# Altium PCB interface.PcbDoc (part 1 of 2)
Units mm, origin at the board's own origin, x right, y up, seen from the top; angles counter-clockwise.
Board outline 52.5 x 75 mm, 4 copper layers (Top Layer 1, Top Layer, Bottom Layer, Bottom Layer 1), stack 1.483 mm thick; 90 components, 72 nets, 327 pads, 41 vias.
Unrouted connection lines stored in the file: 2.
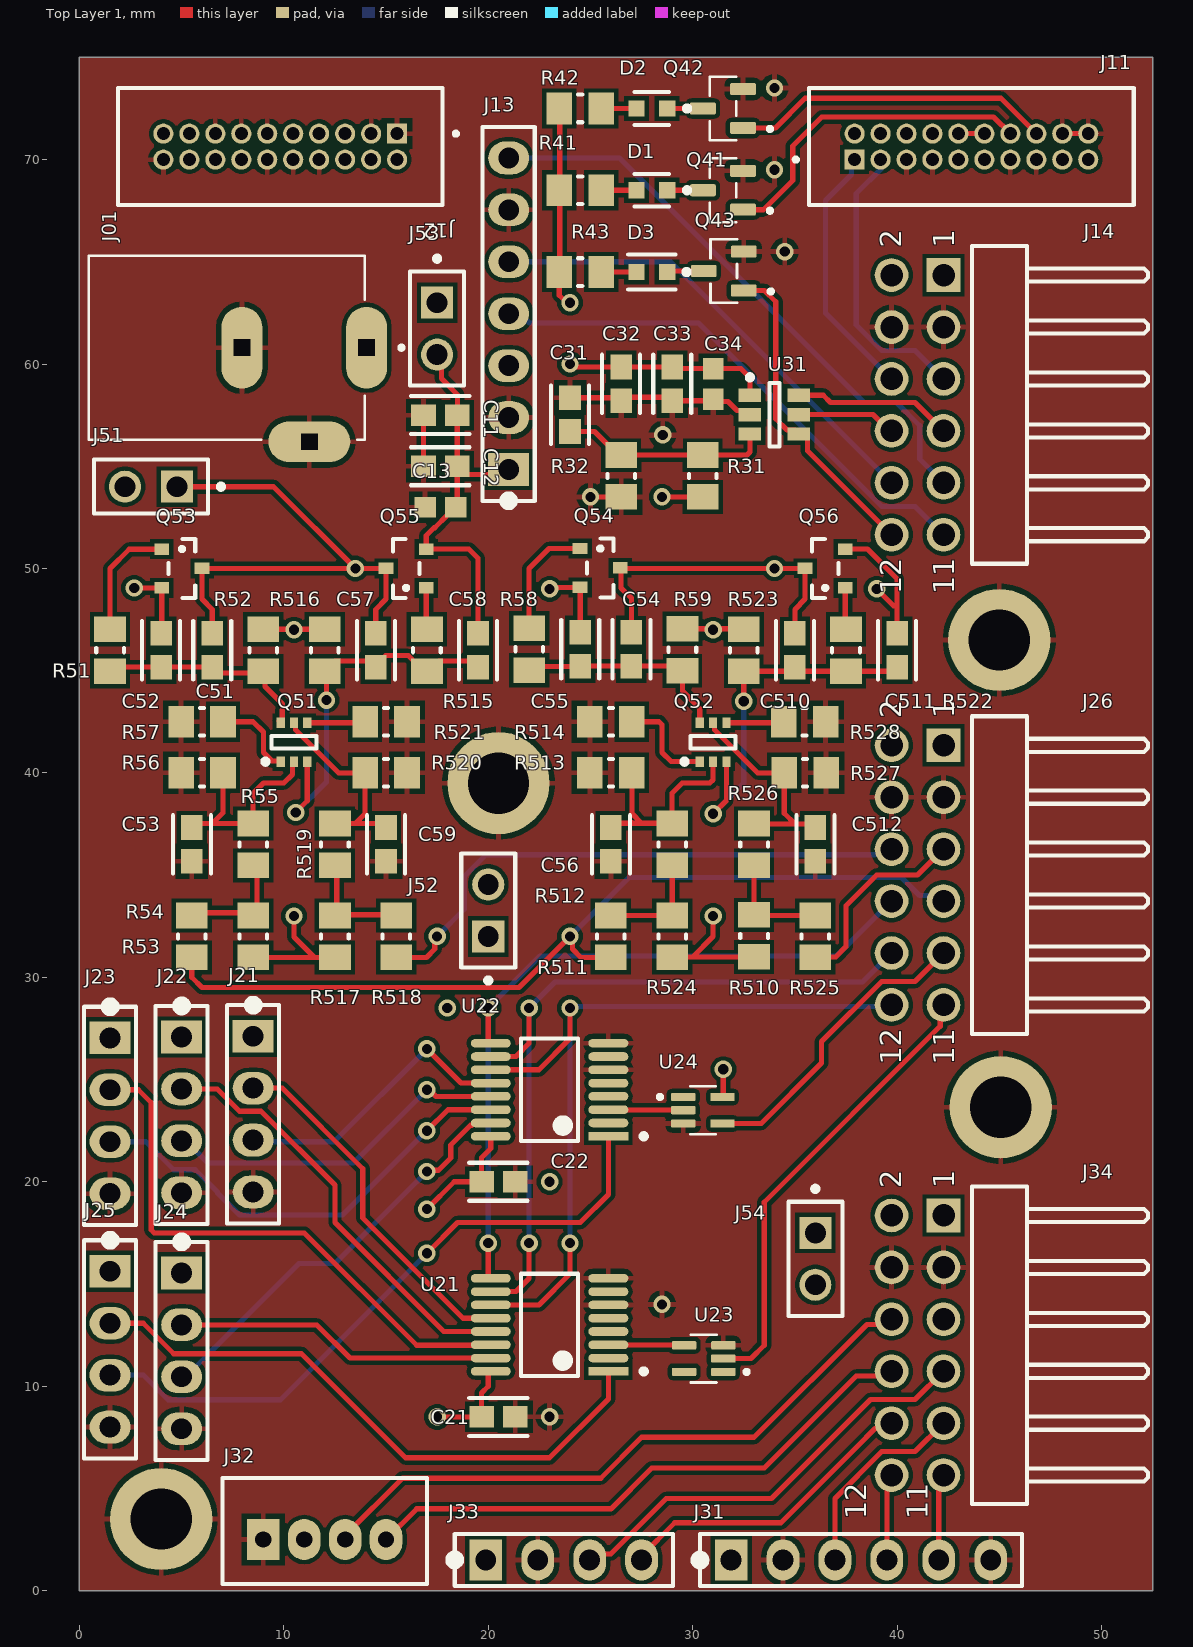
[diagram p0: Top Layer 1 view]
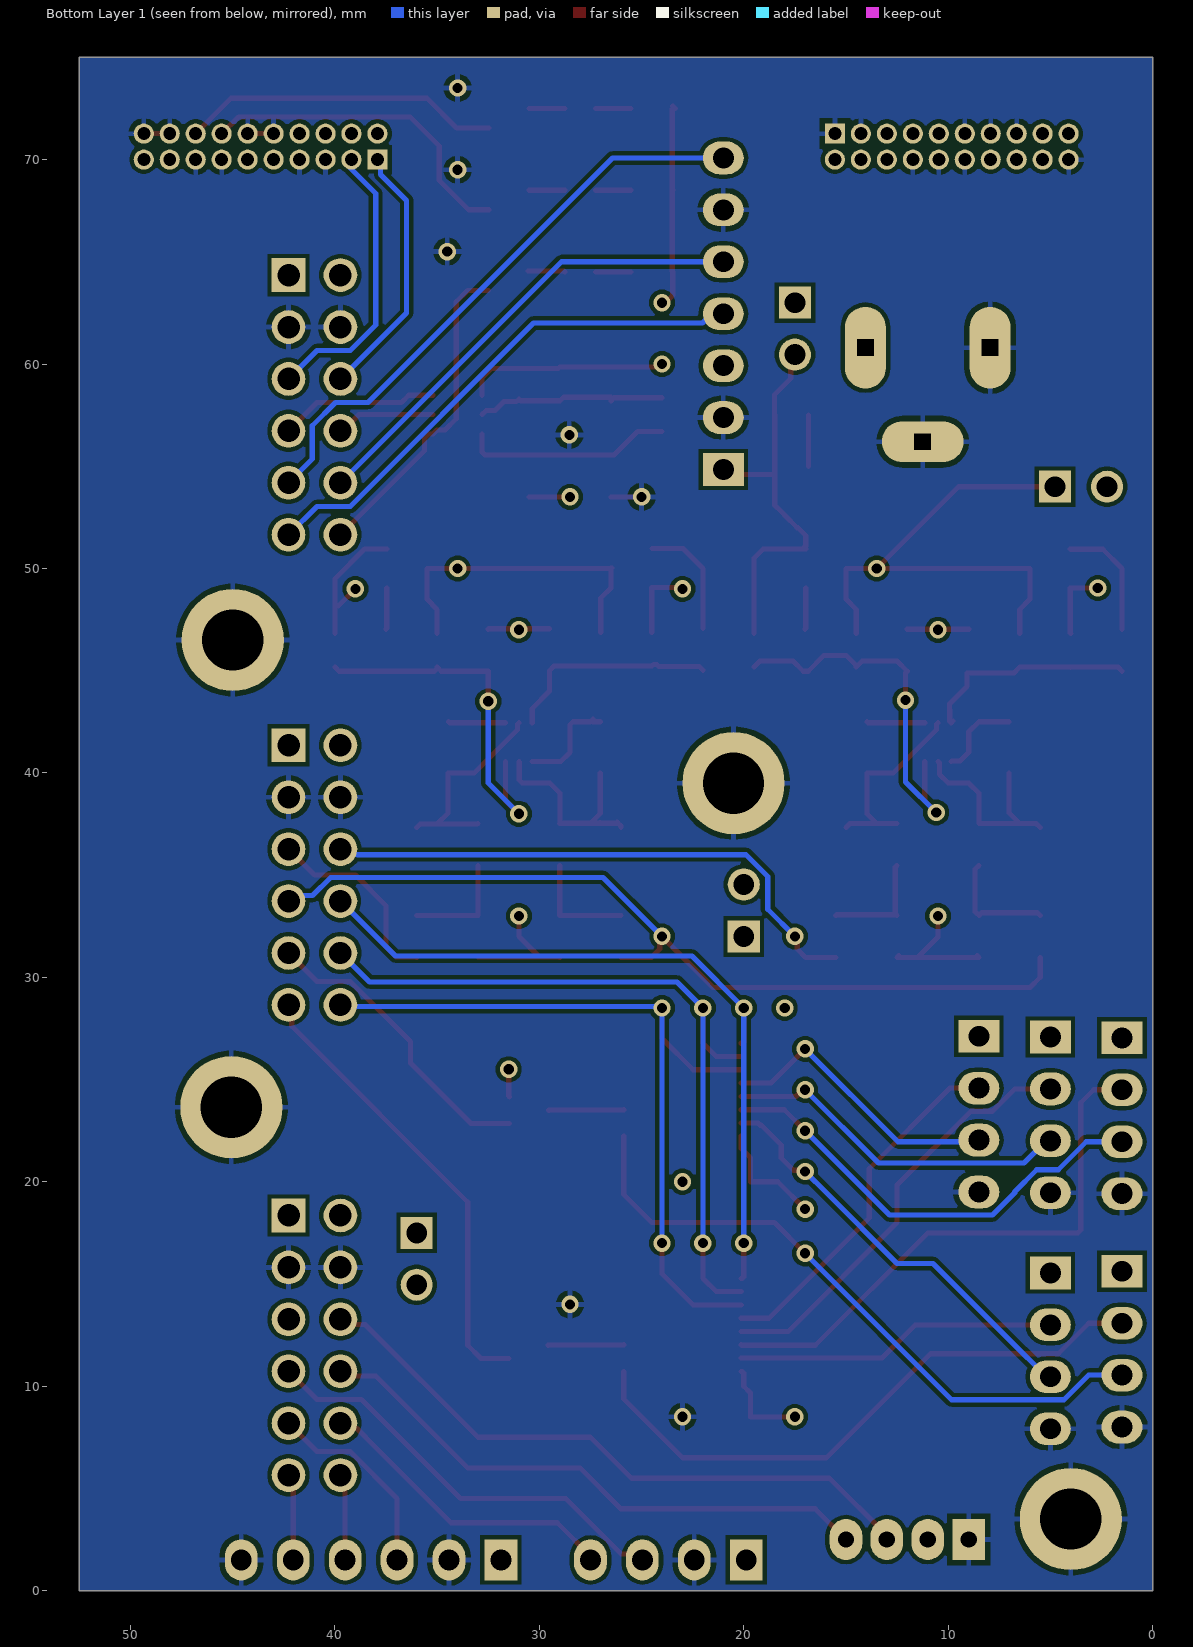
[diagram p1: Bottom Layer 1 view, seen from below]
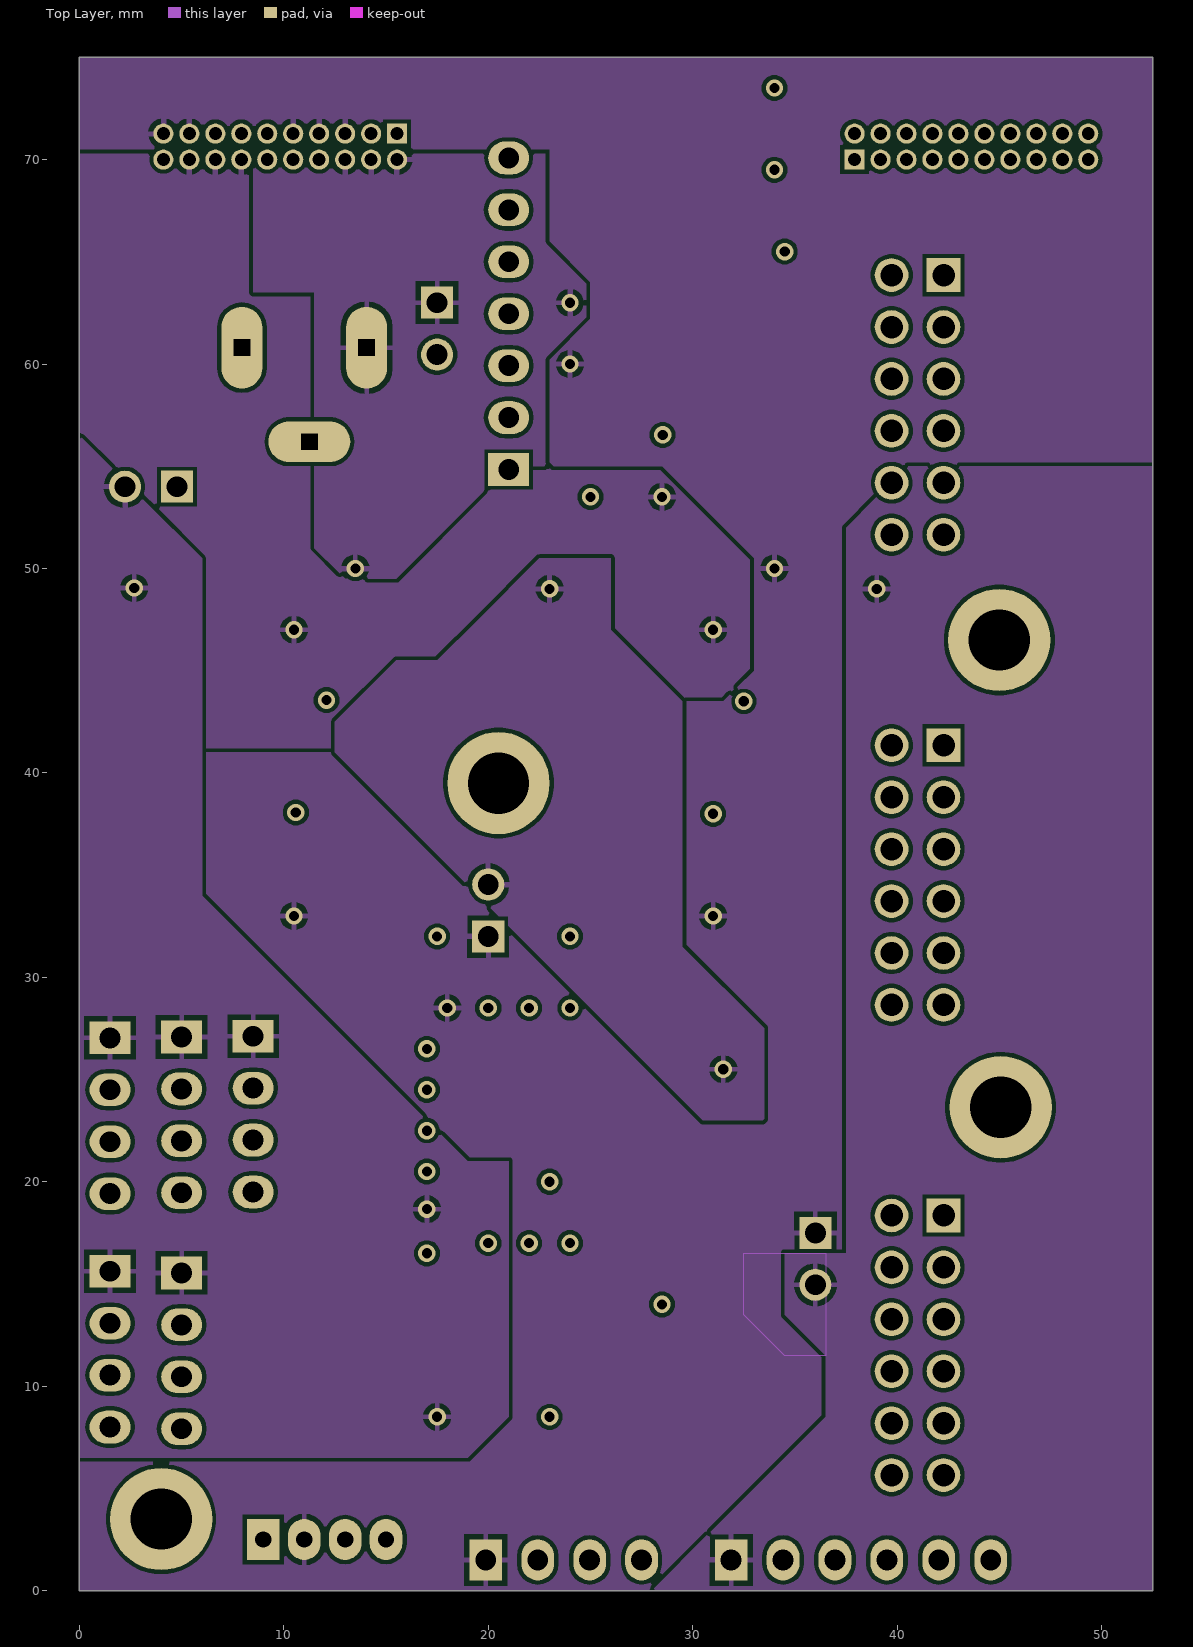
[diagram p2: Top Layer]
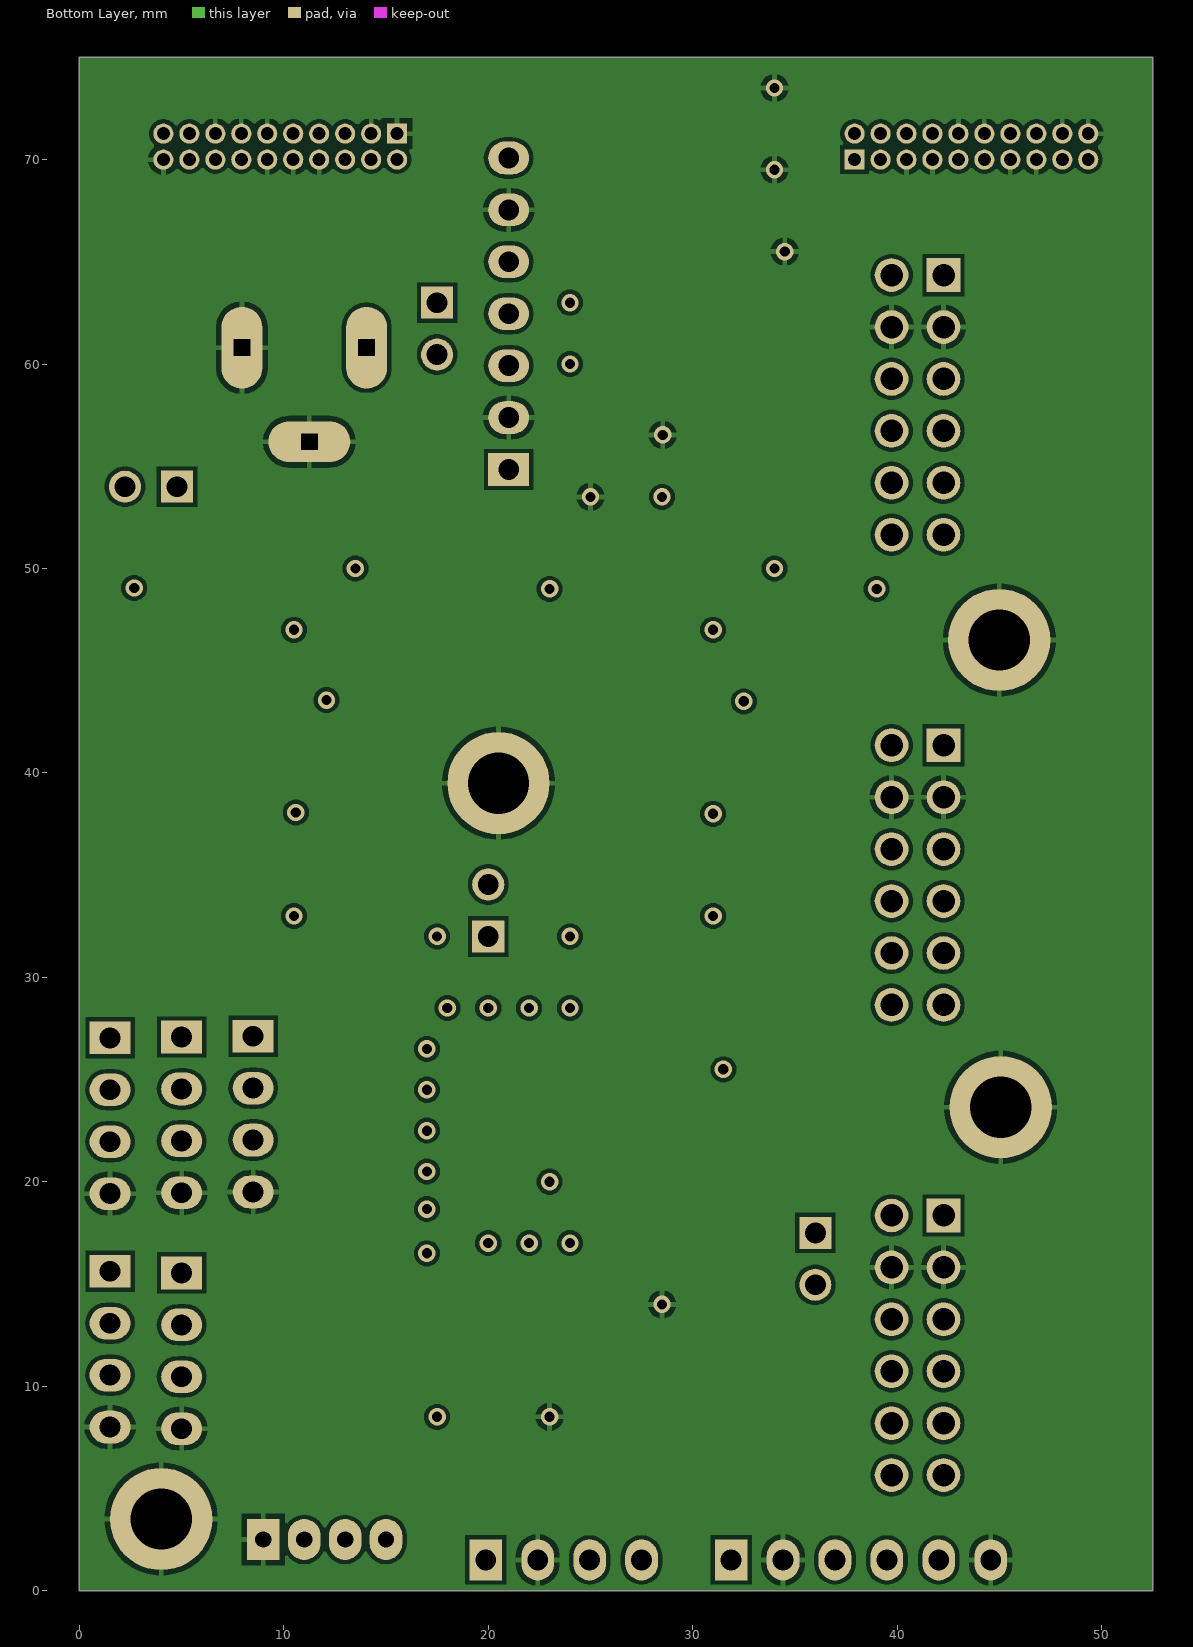
[diagram p3: Bottom Layer]
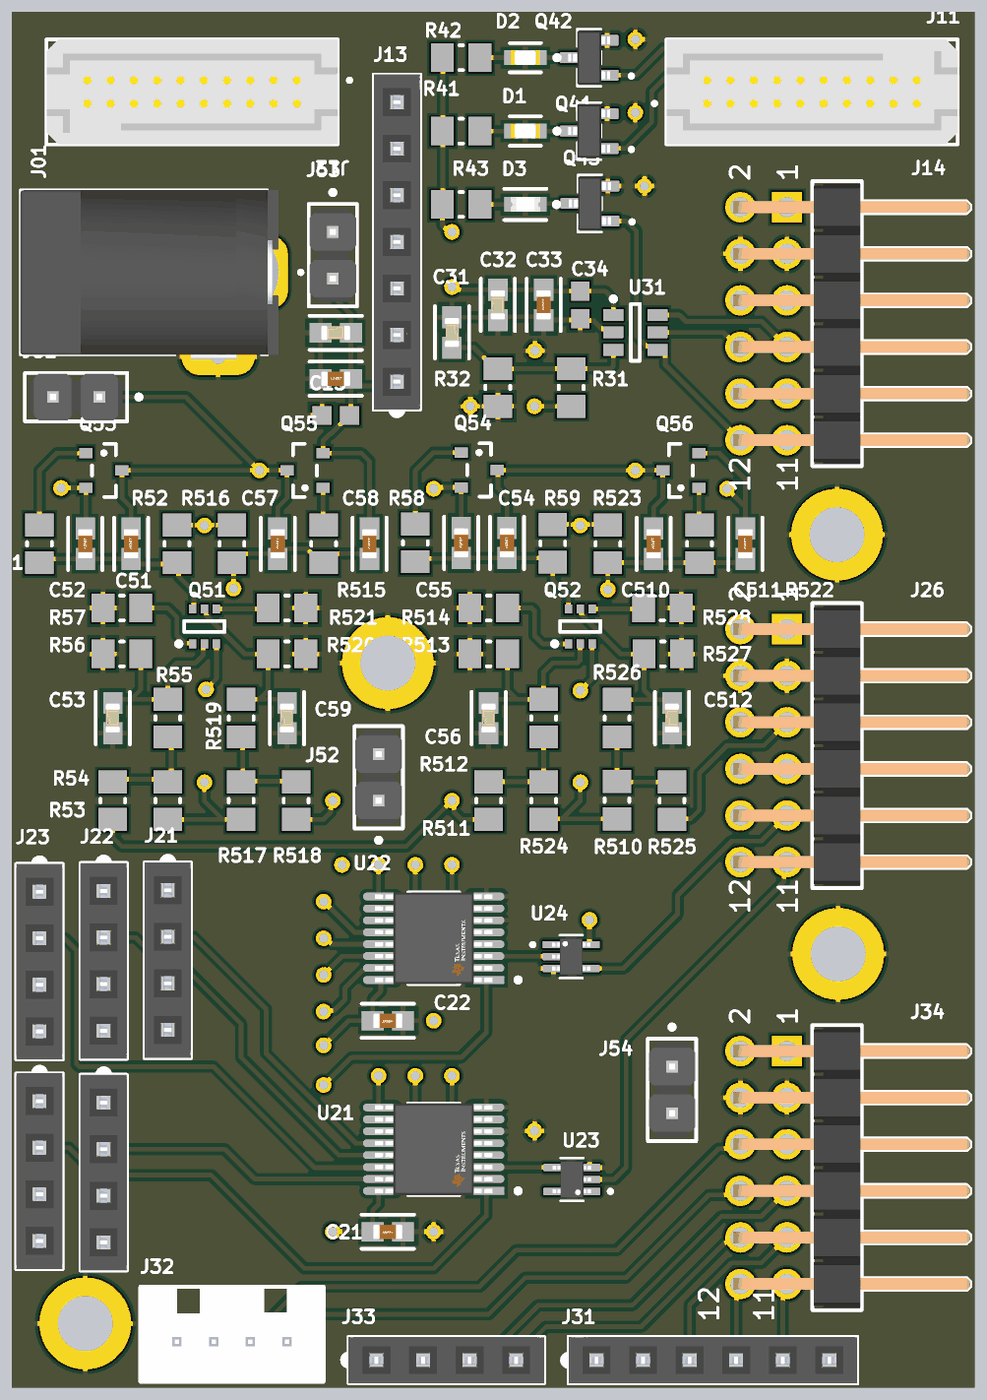
[diagram p4: 3D render of the assembled board from above, using the file's embedded part models]

## Layer stack, top to bottom
Top Solder: solder mask 0.0102, Solder Resist, Dk 3.5
Top Layer 1: signal copper 0.035
Dielectric 2: prepreg 0.0711, PP-006, Dk 4.29
Top Layer: signal copper 0.0356
Dielectric 1: dielectric 1.2, FR-4, Dk 4.8
Bottom Layer: signal copper 0.0356
Dielectric 3: prepreg 0.0711, PP-006, Dk 4.29
Bottom Layer 1: signal copper 0.035
Bottom Solder: solder mask 0.0102, Solder Resist, Dk 3.5

## Board outline
0,0 0,75 52.5,75 52.5,0

## Design rules (kind name [scope] priority, off if disabled: settings)
Clearance [All] p1: gap=0.2 ignorepadtopadclearanceinfootprint=FALSE
PolygonConnect [All] p1: connectstyle=Relief reliefconductorwidth=0.254 reliefentries=4 polygonreliefangle="90 Angle" airgapwidth=0.254
RoutingVias [All] p1: holewidth=0.5 width=0.85 viastyle="Through Hole" minholewidth=0.5 minwidth=0.85 maxholewidth=0.9 maxwidth=1.25
SolderMaskExpansion [All] p1: expansion=0.102 istentingtop=FALSE
Width [All] p1: maxlimit=0.254 minlimit=0.254 preferedwidth=0.254
30 further rules are at their usual default settings.

## Components (designator, comment, footprint, x,y, rotation, side; value= is the part's Value field where it differs from the comment)
C11 "10nF" FP-C0603C-CF-IPC_A 17.66,57.5 r0 top
C12 "100nF" FP-C0603C104K5RAC3121-IPC_A 17.66,55 r0 top
C13 "1µF" CAPC1608X90X35NL15T15 17.66,53 r0 top
C21 "100nF" FP-C0603C104K5RAC3121-IPC_A 20.5,8.5 r180 top
C22 "100nF" FP-C0603C104K5RAC3121-IPC_A 20.5,20 r180 top
C31 "C0603C124K5RACTU" FP-C0603C-CF-IPC_A 24,57.525 r270 top
C32 "10nF" FP-C0603C-CF-IPC_A 26.5,59.025 r90 top
C33 "100nF" FP-C0603C104K5RAC3121-IPC_A 29,59.025 r90 top
C34 "1µF" CAPC1608X90X35NL15T15 31,59.025 r90 top
C51 "100nF" FP-C0603C104K5RAC3121-IPC_A 6.5,46 r90 top
C52 "100nF" FP-C0603C104K5RAC3121-IPC_A 4,46 r90 top
C53 "10nF" FP-C0603C-CF-IPC_A 5.5,36.5 r90 top
C54 "100nF" FP-C0603C104K5RAC3121-IPC_A 27,46.05 r90 top
C55 "100nF" FP-C0603C104K5RAC3121-IPC_A 24.5,46.05 r90 top
C56 "10nF" FP-C0603C-CF-IPC_A 26,36.5 r90 top
C57 "100nF" FP-C0603C104K5RAC3121-IPC_A 14.5,46 r90 top
C58 "100nF" FP-C0603C104K5RAC3121-IPC_A 19.5,46 r90 top
C59 "10nF" FP-C0603C-CF-IPC_A 15,36.5 r90 top
C510 "100nF" FP-C0603C104K5RAC3121-IPC_A 35,46 r90 top
C511 "100nF" FP-C0603C104K5RAC3121-IPC_A 40,46 r90 top
C512 "10nF" FP-C0603C-CF-IPC_A 36,36.5 r90 top
D1 "LTST-C193TGKT-5A" FP-LTST-C193TGKT-5A 28,68.5 r180 top
D2 "LTST-C193TBKT-5A" FP-LTST-C193TBKT-5A-MFG 28,72.5 r180 top
D3 "LTST-C191KRKT" FP-LTST-C191KRKT 28,64.5 r180 top
J01 "CON-SOCJ-2155" GRAVITECH_CON-SOCJ-2155 11,58.5 r0 top
J11 "TFM-110-21-S-D" SAMTEC_TFM-110-21-S-D 43.635,70.635 r0 top
J12 "TFM-110-21-S-D" SAMTEC_TFM-110-21-S-D 9.825,70.635 r180 top
J13 "1x7 Header" "HEADER 1X7" 21,54.84 r180 top
J14 "61301221021" 61301221021 45,58 r90 top
J21 "1x4 Header" "HEADER 1X4" 8.5,27.12 r0 top
J22 "1x4 Header" "HEADER 1X4" 5,27.08 r0 top
J23 "1x4 Header" "HEADER 1X4" 1.5,27.04 r0 top
J24 "1x4 Header" "HEADER 1X4" 5,15.54 r0 top
J25 "1x4 Header" "HEADER 1X4" 1.5,15.62 r0 top
J26 "61301221021" 61301221021 45,35 r90 top
J31 "1x6 Header" "HEADER 1X6" 38.23,1.5 r90 top
J32 "1x4 Grove conector" FP-110990030 9,2.5 r90 top
J33 "1x4 Header" "HEADER 1X4" 19.88,1.5 r90 top
J34 "61301221021" 61301221021 45,12 r90 top
J51 "M20-9990246" FP-M20-9990246-MFG 3.5,54 r180 top
J52 "M20-9990246" FP-M20-9990246-MFG 20,33.27 r90 top
J53 "M20-9990246" FP-M20-9990246-MFG 17.5,61.73 r270 top
J54 "M20-9990246" FP-M20-9990246-MFG 36,16.23 r270 top
Q41 "NXV55UNR" SOT95P230X110-3N 32.46,67.55 r180 top
Q42 "NXV55UNR" SOT95P230X110-3N 32.46,71.55 r180 top
Q43 "NXV55UNR" SOT95P230X110-3N 32.5,63.6 r180 top
Q51 "MBT3904DW1T1G" ONSC-SOT-363-6-419B-02_W_V 10.5,41.5 r90 top
Q52 "MBT3904DW1T1G" ONSC-SOT-363-6-419B-02_W_V 31,41.5 r90 top
Q53 "SI2304BDST1E3" FP-SI2304BDST1E3 4.032,50.95 r0 top
Q54 "SI2304BDST1E3" FP-SI2304BDST1E3 24.493,50.975 r0 top
Q55 "SI2304BDST1E3" FP-SI2304BDST1E3 16.968,49.05 r180 top
Q56 "SI2304BDST1E3" FP-SI2304BDST1E3 37.468,49.05 r180 top
R31 "91k" RESC2013X50X30ML20T20 30.5,54.525 r270 top
R32 "20K" RESC2013X50X30ML20T20 26.5,54.525 r90 top
R41 "390" RESC2013X50X30ML20T20 24.5,68.5 r180 top
R42 "390" RESC2013X50X30ML20T20 24.5,72.5 r180 top
R43 "620" RESC2013X50X30ML20T20 24.5,64.5 r180 top
R51 "10k" RESC2013X50X30ML20T20 1.5,46 r90 top
R52 "100k" RESC2013X50X30ML20T20 9,46 r270 top
R53 "100k" RESC2013X50X30ML20T20 8.5,32 r270 top
R54 "100" RESC2013X50X30ML20T20 5.5,32 r90 top
R55 "10k" RESC2013X50X30ML20T20 8.5,36.5 r90 top
R56 "10k" RESC2013X50X30ML20T20 6,40 r0 top
R57 "8.2k" RESC2013X50X30ML20T20 6,42.5 r0 top
R58 "10k" RESC2013X50X30ML20T20 22,46.05 r90 top
R59 "100k" RESC2013X50X30ML20T20 29.5,46.025 r270 top
R510 "100k" RESC2013X50X30ML20T20 29,32 r270 top
R511 "100" RESC2013X50X30ML20T20 26,32 r90 top
R512 "10k" RESC2013X50X30ML20T20 29,36.5 r90 top
R513 "10k" RESC2013X50X30ML20T20 26,40 r0 top
R514 "8.2k" RESC2013X50X30ML20T20 26,42.5 r0 top
R515 "10k" RESC2013X50X30ML20T20 17,46 r90 top
R516 "100k" RESC2013X50X30ML20T20 12,46 r270 top
R517 "100k" RESC2013X50X30ML20T20 12.5,32 r270 top
R518 "100" RESC2013X50X30ML20T20 15.5,32 r90 top
R519 "10k" RESC2013X50X30ML20T20 12.5,36.5 r90 top
R520 "10k" RESC2013X50X30ML20T20 15,40 r180 top
R521 "8.2k" RESC2013X50X30ML20T20 15,42.5 r180 top
R522 "10k" RESC2013X50X30ML20T20 37.5,46 r90 top
R523 "100k" RESC2013X50X30ML20T20 32.5,46 r270 top
R524 "100k" RESC2013X50X30ML20T20 33,32.025 r270 top
R525 "100" RESC2013X50X30ML20T20 36,32 r90 top
R526 "10k" RESC2013X50X30ML20T20 33,36.5 r90 top
R527 "10k" RESC2013X50X30ML20T20 35.5,40 r180 top
R528 "8.2k" RESC2013X50X30ML20T20 35.475,42.5 r180 top
U21 "TMUX1308PWR" FP-PW0016A-IPC_A 23,13 r180 top
U22 "TMUX1308PWR" FP-PW0016A-IPC_A 23,24.5 r180 top
U23 "SN74LV1T04DCKRG4" SOT65P210X110-5N 30.54,11.35 r180 top
U24 "SN74LV1T04DCKRG4" SOT65P210X110-5N 30.5,23.5 r0 top
U31 "ADC101C021CIMKX/NOPB" MK06A_N 34,57.525 r0 top

## Footprints (in the part's own frame and the unit in brackets; to place one, negate y for a bottom-side part, rotate by r counter-clockwise, add the part's x,y. Pads: shape width x height; smd on the part's side, far side on the other; paste and mask are expansions set on the pad)
61301221021 [mm] "Pin Header, pitch 2.54 mm, THT, Angled, dual row, 12p"
  rect 1.65x1.65 hole 1.1: 1(6.35,2.73)
  round 1.65 hole 1.1: 2(6.35,5.27) 3(3.81,2.73) 4(3.81,5.27) 5(1.27,2.73) 6(1.27,5.27) 7(-1.27,2.73) 8(-1.27,5.27) 9(-3.81,2.73) 10(-3.81,5.27) 11(-6.35,2.73) 12(-6.35,5.27)
  silkscreen extent -7.77,-7.27 7.77,1.35, body extent -7.62,-7.27 7.62,5.63, height 5.12
CAPC1608X90X35NL15T15 [mm] "Chip Capacitor, 2-Leads, Body 1.60x0.81mm, IPC Medium Density"
  rect 1.05x1 smd: 1(-0.75,0) 2(0.75,0)
  body extent -0.88,-0.48 0.87,0.48, height 0.9
FP-110990030 [mm]
  rect 2x1.6 hole 0.8: 1(0,0)
  oval 2x1.6 hole 0.8: 2(0,-2) 3(0,-4) 4(0,-6)
  silkscreen extent -2.17,-8 3,2, body extent -2.15,-8 2.95,2, height 8.11
FP-C0603C104K5RAC3121-IPC_A [mil]
  rect 47.5x41.66 smd paste+0 mask+0: 1(-32.51,0) 2(32.51,0)
  silkscreen extent -56,-37 56,37, body extent -76,-41 76,41, height 10
FP-C0603C-CF-IPC_A [mil]
  rect 47.5x41.66 smd paste+0 mask+0: 1(-32.51,0) 2(32.51,0)
  silkscreen extent -56,-37 56,37, body extent -76,-41 76,41, height 10
FP-LTST-C191KRKT [mm]
  rect 0.8x0.8 smd paste+0 mask+0: 1(-0.75,0) 2(0.75,0)
  silkscreen extent -1.83,-0.85 1.15,0.85, body extent -0.8,-0.4 0.8,0.4, height 0.81
FP-LTST-C193TBKT-5A-MFG [mm]
  rect 0.8x0.8 smd paste+0 mask+0: 1(-0.75,0) 2(0.75,0)
  silkscreen extent -1.85,-0.8 0.85,0.8, body extent -1.25,-0.55 1.25,0.55, height 0.25
FP-LTST-C193TGKT-5A [mm]
  rect 0.8x0.8 smd paste+0 mask+0: 1(-0.75,0) 2(0.75,0)
  silkscreen extent -1.85,-0.8 0.85,0.8, body extent -1.25,-0.55 1.25,0.55, height 0.25
FP-M20-9990246-MFG [mm]
  rect 1.57x1.57 hole 1.02 paste-1000 mask+0: 1(-1.27,0)
  round 1.57 hole 1.02 paste-1000 mask+0: 2(1.27,0)
  silkscreen extent -3.55,-1.32 2.79,1.32, body extent -2.89,-1.42 2.89,1.42, height 0.25
FP-PW0016A-IPC_A [mm]
  rect 1.955x0.421 smd paste+0 mask+0: 1(-2.875,2.275)
  rrect100% 1.955x0.421 smd paste+0 mask+0: 2(-2.875,1.625) 3(-2.875,0.975) 4(-2.875,0.325) 5(-2.875,-0.325) 6(-2.875,-0.975) 7(-2.875,-1.625) 8(-2.875,-2.275) 9(2.875,-2.275) 10(2.875,-1.625) 11(2.875,-0.975) 12(2.875,-0.325) 13(2.875,0.325) 14(2.875,0.975) 15(2.875,1.625) 16(2.875,2.275)
  silkscreen extent -4.73,-2.5 1.4,2.5, body extent -4.35,-3 4.35,3, height 0.25
FP-SI2304BDST1E3 [mm]
  rect 0.724x0.559 smd: 1(0,0) 2(0,-1.9) 3(1.968,-0.95)
  silkscreen extent 0.33,-2.4 1.63,0.5
GRAVITECH_CON-SOCJ-2155 [mm]
  oval 2x4 hole 0.8 square: 1(3.05,2.3) 3(-3.05,2.3)
  oval 4x2 hole 0.8 square: 2(0.25,-2.3)
  silkscreen extent -10.55,-2.2 4.85,6.8, body extent -10.55,-2.45 3.55,6.8, height 11.1
"HEADER 1X4" [mm]
  rect 2x1.6 hole 1.02: 1(0,0)
  oval 2x1.6 hole 1.02: 2(0,-2.54) 3(0,-5.08) 4(0,-7.62)
  silkscreen extent -1.27,-9.15 1.27,1.72, body extent -1.27,-9.14 1.27,1.52, height 8.52
"HEADER 1X6" [mm]
  rect 2x1.6 hole 1.02: 1(0,6.35)
  oval 2x1.6 hole 1.02: 2(0,3.81) 3(0,1.27) 4(0,-1.27) 5(0,-3.81) 6(0,-6.35)
  silkscreen extent -1.28,-7.88 1.28,8.08, body extent -1.27,-7.87 1.27,7.87, height 8.52
"HEADER 1X7" [mm]
  rect 2x1.6 hole 1.02: 1(0,0)
  oval 2x1.6 hole 1.02: 2(0,-2.54) 3(0,-5.08) 4(0,-7.62) 5(0,-10.16) 6(0,-12.7) 7(0,-15.24)
  silkscreen extent -1.28,-16.75 1.28,1.73, body extent -1.27,-16.76 1.27,1.52, height 8.52
MK06A_N [mm] "SOT23, 6-Leads, Body 3.0x1.7mm, Pitch 0.95mm, Lead Span 2.9mm, IPC Medium Density"
  rect 1.1x0.65 smd: 1(-1.2,0.95) 2(-1.2,0) 3(-1.2,-0.95) 4(1.2,-0.95) 5(1.2,0) 6(1.2,0.95)
  silkscreen extent -1.32,-1.55 0.25,1.95, body extent -0.87,-1.53 0.87,1.54, height 1
ONSC-SOT-363-6-419B-02_W_V [mm] "SOT23, 6-Leads, Body 2x1.25mm, Pitch 0.65mm"
  rect 0.5x0.4 smd: 1(-0.95,0.65) 2(-0.95,0) 3(-0.95,-0.65) 4(0.95,-0.65) 5(0.95,0) 6(0.95,0.65)
  silkscreen extent -1.07,-1.1 0.3,1.52, body extent -0.63,-1 0.63,1, height 1.1
RESC2013X50X30ML20T20 [mm] "Chip Resistor, 2-Leads, Body 2.00x1.25mm, IPC Low Density"
  rect 1.25x1.55 smd: 1(-1.025,0) 2(1.025,0)
  silkscreen extent -0.1,-0.67 0.1,0.67, body extent -1.1,-0.72 1.1,0.72, height 0.5
SAMTEC_TFM-110-21-S-D [mm]
  rect 0.985x0.985 hole 0.635: 1(-5.715,-0.635)
  round 0.985 hole 0.635: 2(-5.715,0.635) 3(-4.445,-0.635) 4(-4.445,0.635) 5(-3.175,-0.635) 6(-3.175,0.635) 7(-1.905,-0.635) 8(-1.905,0.635) 9(-0.635,-0.635) 10(-0.635,0.635) 11(0.635,-0.635) 12(0.635,0.635) 13(1.905,-0.635) 14(1.905,0.635) 15(3.175,-0.635) 16(3.175,0.635) 17(4.445,-0.635) 18(4.445,0.635) 19(5.715,-0.635) 20(5.715,0.635)
  silkscreen extent -8.69,-2.86 7.94,2.86, body extent -7.94,-2.86 7.94,2.86, height 9.16
SOT65P210X110-5N [mm]
  rrect25% 1.19x0.4 smd: 1(-0.96,0.65) 2(-0.96,0) 3(-0.96,-0.65) 4(0.96,-0.65) 5(0.96,0.65)
  silkscreen extent -2.2,-1.17 0.63,1.17, body extent -1.05,-1 1.05,1, height 1.1
SOT95P230X110-3N [mm]
  rrect25% 1.26x0.59 smd: 1(0,0) 2(0,-1.9) 3(1.96,-0.95)
  silkscreen extent -1.42,-2.51 1.63,0.61, body extent -0.17,-2.4 2.13,0.5, height 1.11

## Part data
C11 C32 C53 C56 C59 C512: library part C0603C103K5RACTU, "CAP CER 10000PF 50V X7R 0603", Case Code (Imperial)=0603, Case Code (Metric)=1608, Dielectric=X7R, Dielectric Material=Ceramic, Manufacturer=KEMET, Max Operating Temperature=125°C, Min Operating Temperature=-55°C, Package Quantity=4000, Tolerance=10%, Voltage=50V, Capacitance=10nF, Case/Package=0603, Category="Ceramic Capacitors", ComponentLink1Description=https://datasheet.ciiva.com/7823/1732718-7823585.pdf?src-supplier=Element14, ComponentLink1URL=https://datasheet.ciiva.com/7823/1732718-7823585.pdf?src-supplier=Element14, ComponentLink2Description=https://datasheet.ciiva.com/5904/kem-c1002-x7r-smd-5904645.pdf?src-supplier=Farnell, ComponentLink2URL=https://datasheet.ciiva.com/5904/kem-c1002-x7r-smd-5904645.pdf?src-supplier=Farnell, ComponentLink3Description=https://datasheet.ciiva.com/7823/kem-c1002-x7r-smd-7823976.pdf?src-supplier=Element14, ComponentLink3URL=https://datasheet.ciiva.com/7823/kem-c1002-x7r-smd-7823976.pdf?src-supplier=Element14, ComponentLink4Description=https://datasheet.ciiva.com/7823/1918693-7823978.pdf?src-supplier=Element14, ComponentLink4URL=https://datasheet.ciiva.com/7823/1918693-7823978.pdf?src-supplier=Element14, ComponentLink5Description=https://datasheet.ciiva.com/28645/1851736-28645598.pdf?src-supplier=Element14, ComponentLink5URL=https://datasheet.ciiva.com/28645/1851736-28645598.pdf?src-supplier=Element14, ComponentLink6Description=https://datasheet.ciiva.com/7823/kem-c1002-x7r-smd-7823977.pdf?src-supplier=Element14, ComponentLink6URL=https://datasheet.ciiva.com/7823/kem-c1002-x7r-smd-7823977.pdf?src-supplier=Element14, ComponentLink7Description=https://datasheet.ciiva.com/14585/70095383-14585450.pdf?src-supplier=Allied+Electronics, ComponentLink7URL=https://datasheet.ciiva.com/14585/70095383-14585450.pdf?src-supplier=Allied+Electronics, ComponentLink8Description=https://datasheet.ciiva.com/5416/kem-c1002-x7r-smd-5416028.pdf?src-supplier=Mouser, ComponentLink8URL=https://datasheet.ciiva.com/5416/kem-c1002-x7r-smd-5416028.pdf?src-supplier=Mouser, ComponentLink9Description=https://datasheet.ciiva.com/39122/kem-c1002-x7r-smd-39122903.pdf?src-supplier=Onlinecomponents.com, ComponentLink9URL=https://datasheet.ciiva.com/39122/kem-c1002-x7r-smd-39122903.pdf?src-supplier=Onlinecomponents.com, ComponentLink10Description=https://datasheet.ciiva.com/18192/getdatasheetpartid-308803-18192662.pdf?src-supplier=Verical, ComponentLink10URL=https://datasheet.ciiva.com/18192/getdatasheetpartid-308803-18192662.pdf?src-supplier=Verical, ComponentLink11Description=https://datasheet.ciiva.com/18101/getdatasheetpartid-58468-18101898.pdf?src-supplier=Verical, ComponentLink11URL=https://datasheet.ciiva.com/18101/getdatasheetpartid-58468-18101898.pdf?src-supplier=Verical, Construction=Flat, Contact Plating=Tin,Matte, Depth=0.8mm, Dissipation Factor=2.5%, Height=0.8mm, Lead Pitch=0.7mm, Length=1.6mm, Manufacturer Part Number=C0603C103K5RACTU, Mount="Surface Mount,PCB", Number of Pins=2, Packaging="Tape and Reel", Pricing 1="1=0,16000, 10=0,07400, 50=0,07400, 100=0,03300, 500=0,02400, 1000=0,01900, 2000=0,01700, 4000=0,01500, 8000=0,01300, 10000=0,01300 (USD)", Radiation Hardening=No, REACH SVHC="No SVHC", RoHS=Yes, RoHS Compliant=Yes, Series=C0603C, Stock 1=1844699, Supplier 1=Mouser, Termination=SMD/SMT, Thickness=0.034inch, Voltage Rating=50V, Voltage Rating (DC)=50V, Width=0.8mm
C12 C21 C22 C33 C51 C52 C54 C55 C57 C58 C510 C511: library part C0603C104K5RAC3121, "Cap Ceramic 0.1uF 50V X7R 10% Pad SMD 0603 125°C T/R", Case/Package=0603, Manufacturer=KEMET, Category="Ceramic Capacitors", Manufacturer Part Number=C0603C104K5RAC3121, Pricing 1="1=0,13000, 10=0,09200, 50=0,09200, 100=0,04300, 1000=0,02500, 10000=0,01900 (USD)", RoHS=Yes, RoHS Compliant=Yes, Stock 1=3306727, Supplier 1=Mouser
C13 C34: library part C0603C105K4RACTU, "Cap Ceramic 1uF 16V X7R 10% SMD 0603 125°C Paper T/R", Capacitance=1uF, Case Code (Imperial)=0603, Case Code (Metric)=1608, Dielectric=X7R, Dielectric Material=Ceramic, Manufacturer=KEMET, Max Operating Temperature=125°C, Min Operating Temperature=-55°C, Package Quantity=4000, Tolerance=10%, Voltage=16V, Case/Package=0603, Category="Ceramic Capacitors", ComponentLink1Description=https://datasheet.ciiva.com/7823/kem-c1002-x7r-smd-7823997.pdf?src-supplier=Element14, ComponentLink1URL=https://datasheet.ciiva.com/7823/kem-c1002-x7r-smd-7823997.pdf?src-supplier=Element14, ComponentLink2Description=https://datasheet.ciiva.com/22749/kem-c1002-x7r-smd-22749721.pdf?src-supplier=Element14, ComponentLink2URL=https://datasheet.ciiva.com/22749/kem-c1002-x7r-smd-22749721.pdf?src-supplier=Element14, ComponentLink3Description=https://datasheet.ciiva.com/5419/kem-c1002-x7r-smd-5419750.pdf?src-supplier=Mouser, ComponentLink3URL=https://datasheet.ciiva.com/5419/kem-c1002-x7r-smd-5419750.pdf?src-supplier=Mouser, ComponentLink4Description=https://datasheet.ciiva.com/18192/getdatasheetpartid-385479-18192732.pdf?src-supplier=Verical, ComponentLink4URL=https://datasheet.ciiva.com/18192/getdatasheetpartid-385479-18192732.pdf?src-supplier=Verical, Construction=Flat, Contact Plating=Tin,Matte, Depth=0.8mm, Dissipation Factor=3.5%, Height=0.8mm, Length=1.6mm, Manufacturer Part Number=C0603C105K4RACTU, Mount="Surface Mount,PCB", Number of Pins=2, Packaging="Tape and Reel", Pricing 1="1=0,17000, 10=0,08000, 50=0,08000, 100=0,03600, 500=0,02600, 1000=0,02000, 2000=0,01900, 4000=0,01600, 8000=0,01400, 10000=0,01400 (USD)", Radiation Hardening=No, REACH SVHC="No SVHC", RoHS=Yes, RoHS Compliant=Yes, Series=C0603C, Stock 1=3280807, Supplier 1=Mouser, Termination=SMD/SMT, Thickness=0.034inch, Voltage Rating=16V, Voltage Rating (DC)=16V, Width=0.031inch
C31: "0603 C 120nF Ceramic Multilayer Capacitor; 50 V; +125degC; X7R Dielec; +/-10%", Capacitance=120nF, Case Code (Imperial)=0603, Case Code (Metric)=1608, Dielectric=X7R, Dielectric Material=Ceramic, Manufacturer=KEMET, Max Operating Temperature=125°C, Min Operating Temperature=-55°C, Package Quantity=1, Supplier Part Number 1=80-C0603C124K5RACTU, Tolerance=10%, Voltage=50V, Case/Package=0603, Category="Ceramic Capacitors", ComponentLink1Description=https://datasheet.ciiva.com/7823/1633156-7823623.pdf?src-supplier=Element14, ComponentLink1URL=https://datasheet.ciiva.com/7823/1633156-7823623.pdf?src-supplier=Element14, ComponentLink2Description=https://datasheet.ciiva.com/22693/1851736-22693982.pdf?src-supplier=Element14, ComponentLink2URL=https://datasheet.ciiva.com/22693/1851736-22693982.pdf?src-supplier=Element14, Construction=Flat, Depth=0.8mm, Height=0.8mm, Length=1.6mm, Manufacturer Part Number=C0603C124K5RACTU, Number of Pins=2, Packaging="Cut Tape", Pricing 1="1=0,37000, 10=0,18700, 50=0,18700, 100=0,15600, 500=0,11800, 1000=0,10300, 4000=0,09000, 8000=0,08200, 10000=0,08200, 12000=0,08100 (USD)", Radiation Hardening=No, REACH SVHC="No SVHC", RoHS=Yes, RoHS Compliant=Yes, Series=C, Stock 1=90207, Supplier 1=Mouser, Termination=SMD/SMT, Thickness=0.034inch, Voltage Rating=50V, Voltage Rating (DC)=50V, Width=0.031inch
D1: "0603(H=0.35mm) 绿色 λD=520nm~535nm VR=5V VF=2.5V~3.1V IF=5mA PD=76mW", Case Code (Imperial)=0603, Case Code (Metric)=1608, Color=Green, Forward Current=5mA, Forward Voltage=3.1V, Lens Color=Colorless, Manufacturer="Vishay Lite-On", Max Operating Temperature=80°C, Min Operating Temperature=-20°C, Package Quantity=3000, Power Dissipation=76mW, Reverse Voltage=5V, Supplier Part Number 1=859-LTSTC193TGKT5A, Case/Package=0603, Category=LEDs, ComponentLink1Description=https://datasheet.ciiva.com/2111/ltst-c193tgkt-5a-2111818.pdf?src-supplier=Digi-Key, ComponentLink1URL=https://datasheet.ciiva.com/2111/ltst-c193tgkt-5a-2111818.pdf?src-supplier=Digi-Key, ComponentLink2Description=https://datasheet.ciiva.com/11775/0900766b80dc0555-11775617.pdf?src-supplier=RSComponents, ComponentLink2URL=https://datasheet.ciiva.com/11775/0900766b80dc0555-11775617.pdf?src-supplier=RSComponents, ComponentLink3Description=https://datasheet.ciiva.com/4689/lite-on-ltst-c193tgkt-5a-187259-4689610.pdf?src-supplier=Mouser, ComponentLink3URL=https://datasheet.ciiva.com/4689/lite-on-ltst-c193tgkt-5a-187259-4689610.pdf?src-supplier=Mouser, ComponentLink4Description=https://datasheet.ciiva.com/2111/p-100-ltst-c193tgkt-5a-2111819.pdf?src-supplier=Digi-Key, ComponentLink4URL=https://datasheet.ciiva.com/2111/p-100-ltst-c193tgkt-5a-2111819.pdf?src-supplier=Digi-Key, ComponentLink5Description=https://datasheet.ciiva.com/2111/p-100-ltst-c193tgkt-5a-2111820.pdf?src-supplier=Digi-Key, ComponentLink5URL=https://datasheet.ciiva.com/2111/p-100-ltst-c193tgkt-5a-2111820.pdf?src-supplier=Digi-Key, Depth=0.8mm, Dominant Wavelength=535nm, Height=0.35mm, Illumination Color=Green, Lead Free="Lead Free", Length=1.6mm, Lens Style=Diffused,Colorless,Rectangular, Lens Transparency=Clear, Luminous Intensity=280mcd, Manufacturer Part Number=LTST-C193TGKT-5A, Mount="Surface Mount", Number of Elements=1, Number of LEDs=1, Number of Pins=2, Packaging="Tape and Reel", Pricing 1="1=0,44000, 10=0,27500, 50=0,27500, 100=0,15800, 1000=0,12400, 5000=0,11300, 10000=0,09600, 25000=0,09200, 50000=0,08900 (USD)", Radiation Hardening=No, RoHS=Yes, RoHS Compliant=Yes, Series=-, Stock 1=78292, Supplier 1=Mouser, Test Current=5mA, Viewing Angle=130°, Width=0.8mm
D2: "0603(H=0.35mm) 蓝色 λD=465nm~475nm VR=5V VF=2.65V~3.05V IF=5mA PD=76mW", Case Code (Imperial)=0603, Case Code (Metric)=1608, Color=Blue, Forward Current=20mA, Forward Voltage=2.8V, Lens Color=Colorless, Manufacturer="Vishay Lite-On", Max Operating Temperature=80°C, Min Operating Temperature=-20°C, Package Quantity=1, Power Dissipation=76mW, Reverse Voltage=5V, Supplier Part Number 1=859-LTSTC193TBKT5A, Test Current=5mA, Case/Package=0603, Category=LEDs, ComponentLink1Description=https://datasheet.ciiva.com/2111/ltst-c193tbkt-5a-2111219.pdf?src-supplier=Digi-Key, ComponentLink1URL=https://datasheet.ciiva.com/2111/ltst-c193tbkt-5a-2111219.pdf?src-supplier=Digi-Key, ComponentLink2Description=https://datasheet.ciiva.com/11773/0900766b80dc0554-11773880.pdf?src-supplier=RSComponents, ComponentLink2URL=https://datasheet.ciiva.com/11773/0900766b80dc0554-11773880.pdf?src-supplier=RSComponents, ComponentLink3Description=https://datasheet.ciiva.com/4688/lite-on-ltst-c193tbkt-5a-187386-4688832.pdf?src-supplier=Mouser, ComponentLink3URL=https://datasheet.ciiva.com/4688/lite-on-ltst-c193tbkt-5a-187386-4688832.pdf?src-supplier=Mouser, ComponentLink4Description=https://datasheet.ciiva.com/16210/ltst-c193tbkt-5a-16210824.pdf?src-supplier=Future+Electronics, ComponentLink4URL=https://datasheet.ciiva.com/16210/ltst-c193tbkt-5a-16210824.pdf?src-supplier=Future+Electronics, ComponentLink5Description=https://datasheet.ciiva.com/15201/getdatasheetpartid-293056-15201395.pdf?src-supplier=Verical, ComponentLink5URL=https://datasheet.ciiva.com/15201/getdatasheetpartid-293056-15201395.pdf?src-supplier=Verical, ComponentLink6Description=https://datasheet.ciiva.com/2111/p-100-ltst-c193tbkt-5a-2111220.pdf?src-supplier=Digi-Key, ComponentLink6URL=https://datasheet.ciiva.com/2111/p-100-ltst-c193tbkt-5a-2111220.pdf?src-supplier=Digi-Key, ComponentLink7Description=https://datasheet.ciiva.com/2111/p-100-ltst-c193tbkt-5a-2111221.pdf?src-supplier=Digi-Key, ComponentLink7URL=https://datasheet.ciiva.com/2111/p-100-ltst-c193tbkt-5a-2111221.pdf?src-supplier=Digi-Key, Depth=0.8mm, Dominant Wavelength=475nm, Height=0.35mm, Illumination Color=Blue, Lead Free="Lead Free", Length=1.6mm, Lens Style=Diffused,Colorless,Rectangular,Clear, Lens Transparency=Clear, Luminous Intensity=15mcd, Manufacturer Part Number=LTST-C193TBKT-5A, Mount="Surface Mount", Number of Elements=1, Number of LEDs=1, Number of Pins=2, Packaging="Tape and Reel", Pricing 1="1=0,30000, 10=0,23400, 50=0,23400, 100=0,10600, 500=0,09500, 1000=0,07800, 5000=0,06700, 10000=0,05400, 25000=0,05000, 50000=0,04500 (USD)", Radiation Hardening=No, RoHS=Yes, RoHS Compliant=Yes, Stock 1=327691, Supplier 1=Mouser, Viewing Angle=130°, Width=0.8mm
D3: "0603(H=0.65mm) 红色 λD=631nm VR=5V VF=2.0V~2.4V IF=20mA PD=75mW", Case Code (Imperial)=0603, Case Code (Metric)=1608, Color=Red, Forward Current=30mA, Forward Voltage=2V, Lens Color=Colorless, Manufacturer="Vishay Lite-On", Max Operating Temperature=85°C, Min Operating Temperature=-55°C, Package Quantity=1, Power Dissipation=75mW, Reverse Voltage=5V, Supplier Part Number 1=859-LTST-C191KRKT, Test Current=20mA, Case/Package=0603, Category=LEDs, ComponentLink1Description=https://datasheet.ciiva.com/11773/0900766b80dc02b2-11773601.pdf?src-supplier=RSComponents, ComponentLink1URL=https://datasheet.ciiva.com/11773/0900766b80dc02b2-11773601.pdf?src-supplier=RSComponents, ComponentLink2Description=https://datasheet.ciiva.com/12400/lite-on-ltst-c191krkt-190135-12400910.pdf?src-supplier=Mouser, ComponentLink2URL=https://datasheet.ciiva.com/12400/lite-on-ltst-c191krkt-190135-12400910.pdf?src-supplier=Mouser, ComponentLink3Description=https://datasheet.ciiva.com/16212/ltst-c191krkt-16212419.pdf?src-supplier=Future+Electronics, ComponentLink3URL=https://datasheet.ciiva.com/16212/ltst-c191krkt-16212419.pdf?src-supplier=Future+Electronics, ComponentLink4Description=https://datasheet.ciiva.com/15117/getdatasheetpartid-141922-15117737.pdf?src-supplier=Verical, ComponentLink4URL=https://datasheet.ciiva.com/15117/getdatasheetpartid-141922-15117737.pdf?src-supplier=Verical, ComponentLink5Description=https://datasheet.ciiva.com/2109/s-110-ltst-c191krkt-2109971.pdf?src-supplier=Digi-Key, ComponentLink5URL=https://datasheet.ciiva.com/2109/s-110-ltst-c191krkt-2109971.pdf?src-supplier=Digi-Key, ComponentLink6Description=https://datasheet.ciiva.com/2109/s-110-ltst-c191krkt-2109970.pdf?src-supplier=Digi-Key, ComponentLink6URL=https://datasheet.ciiva.com/2109/s-110-ltst-c191krkt-2109970.pdf?src-supplier=Digi-Key, ComponentLink7Description=https://datasheet.ciiva.com/2109/s-110-ltst-c191krkt-2109972.pdf?src-supplier=Digi-Key, ComponentLink7URL=https://datasheet.ciiva.com/2109/s-110-ltst-c191krkt-2109972.pdf?src-supplier=Digi-Key, Depth=0.8mm, Dominant Wavelength=631nm, Height=0.55mm, Illumination Color=Red, Lead Free="Lead Free", Length=1.6mm, Lens Style=Clear,Diffused,Colorless,Rectangular, Lens Transparency=Clear, Luminous Intensity=54mcd, Manufacturer Part Number=LTST-C191KRKT, Mount="Surface Mount", Number of Elements=1, Number of LEDs=1, Number of Pins=2, Packaging="Tape and Reel", Power Rating=75mW, Pricing 1="1=0,26000, 10=0,14200, 50=0,14200, 100=0,06600, 500=0,06100, 1000=0,04800, 5000=0,04600, 10000=0,03600, 25000=0,03200, 50000=0,02900 (USD)", Radiation Hardening=No, RoHS=Yes, RoHS Compliant=Yes, Stock 1=594160, Supplier 1=Mouser, Viewing Angle=130°, Voltage=2V, Wavelength=639nm, Width=0.8mm
J01: "DC Power Connectors Power Jack/Connector 2.1mm x 5.5mm", Color=Black, Manufacturer=Gravitech, Supplier Part Number 1=992-CON-SOCJ-2155, Category=Uncategorized, ComponentLink1Description=http://www.gravitech.us/poja2x51.html?src-supplier=Mouser, ComponentLink1URL=http://www.gravitech.us/poja2x51.html?src-supplier=Mouser, Connector Type=Power, Contact Gender=Female, Manufacturer Part Number=CON-SOCJ-2155, Pricing 1="1=1,00000, 10=1,00000, 50=1,00000, 100=1,00000, 1000=1,00000, 10000=1,00000 (USD)", RoHS=Yes, Stock 1=14426, Supplier 1=Mouser
J11 J12: "SAMTEC         TFM-110-21-S-D             Board-To-Board Connector, TFM Series, 20 Contacts, Header, 1.27 mm, Through Hole, 2 Rows", Housing Color=Black, Manufacturer=Samtec, Max Current Rating=5A, Max Operating Temperature=125°C, Max Voltage Rating (AC)=350V, Min Operating Temperature=-55°C, Supplier Part Number 1=200-TFM11021SD, Category=Connectors, ComponentLink1Description=http://www.farnell.com/datasheets/2047776.pdf?src-supplier=Farnell, ComponentLink1URL=http://www.farnell.com/datasheets/2047776.pdf?src-supplier=Farnell, ComponentLink2Description=http://www.samtec.com/documents/webfiles/pdf/TFM_SM.PDF?src-supplier=Avnet, ComponentLink2URL=http://www.samtec.com/documents/webfiles/pdf/TFM_SM.PDF?src-supplier=Avnet, Contact Material=Bronze, Contact Plating=Gold, Depth=5.72mm, Gender=Male, Housing Material=Polymer, Length=15.88mm, Manufacturer Part Number=TFM-110-21-S-D, Number of Contacts=20, Number of Rows=2, Orientation=Straight, Packaging=Rail/Tube, Pitch=1.27mm, Pricing 1="1=7,99000, 10=7,65000, 50=7,65000, 100=7,65000, 1000=5,32000, 10000=4,66000 (USD)", REACH SVHC="No SVHC", RoHS=Yes, RoHS Compliant=Yes, Stock 1=11, Supplier 1=Mouser, Termination=Solder
J13: library part PPTC071LFBN-RC, "Female, 7C, Straight, .100\"CC; 3.20mm Tail, No Mt. 100u\" Tin; PBT, Phos Bronze, 105 C", Color=Black, Manufacturer=Sullins, Package Quantity=1000, Supplier Part Number 1=S7005-ND, Category=Connectors, ComponentLink1Description=https://media.digikey.com/pdf/Data%20Sheets/Sullins%20PDFs/Female_Headers.100_DS.pdf?src-supplier=Digi-Key, ComponentLink1URL=https://media.digikey.com/pdf/Data%20Sheets/Sullins%20PDFs/Female_Headers.100_DS.pdf?src-supplier=Digi-Key, ComponentLink2Description=http://www.sullinscorp.com/catalogs/78_Page80-81_HEADER_.100_2.54mm_FEMALE.pdf?src-supplier=Future+Electronics, ComponentLink2URL=http://www.sullinscorp.com/catalogs/78_Page80-81_HEADER_.100_2.54mm_FEMALE.pdf?src-supplier=Future+Electronics, Connector Type=Header,Socket, Contact Material=Bronze, Contact Plating=Tin, Height=8.5mm, Housing Material=Plastic, Lead Free="Lead Free", Length=18.3mm, Manufacturer Part Number=PPTC071LFBN-RC, Mount="Through Hole", Number of Positions=7, Number of Rows=1, Packaging=Bulk, Pitch=0.1inch, Pricing 1="1=0,59000, 10=0,51500, 80=0,42438, 440=0,36900, 1000=0,30442, 5000=0,26752, 10000=0,26650 (USD)", RoHS=Yes, Stock 1=23266, Supplier 1=Digi-Key, Termination=Solder, Width=2.5mm
J14 J26 J34: "THT Angled Pin Header WR-PHD, Pitch 2.54 mm, Dual Row, 12 pins", Contact Resistance=20mOhm, Manufacturer="Wurth Elektronik", Operating Temperature=-40to105degC, Rated Current=3A, Withstanding Voltage=500VAC, Working Voltage=250VAC, Datasheet URL=https://katalog.we-online.de/em/datasheet/6130xx21021.pdf, Gender=Male, Manufacturer URL=http://www.we-online.de, Mounting Technology=THT, Orientation=Angled, Package Reference=61301221021, Packaging=Bag, Part Number=61301221021, Pin Number=12, Pitch=2.54mm, Publisher=WurthElektronik, Row Number=Dual
J21 J22 J23 J24 J25 J33: library part PPPC041LFBN-RC, "4 Positions Embase Connecteur 0,100 po (2,54mm) Trou traversant Or", Color=Black, Manufacturer=Sullins, Package Quantity=1000, Supplier Part Number 1=S7037-ND, Category=Connectors, ComponentLink1Description=https://media.digikey.com/pdf/Data%20Sheets/Sullins%20PDFs/Female_Headers.100_DS.pdf?src-supplier=Digi-Key, ComponentLink1URL=https://media.digikey.com/pdf/Data%20Sheets/Sullins%20PDFs/Female_Headers.100_DS.pdf?src-supplier=Digi-Key, ComponentLink2Description=http://www.sullinscorp.com/catalogs/78_Page80-81_HEADER_.100_2.54mm_FEMALE.pdf?src-supplier=Future+Electronics, ComponentLink2URL=http://www.sullinscorp.com/catalogs/78_Page80-81_HEADER_.100_2.54mm_FEMALE.pdf?src-supplier=Future+Electronics, Connector Type=Header, Contact Material=Bronze, Contact Plating=Gold, Contact Type="Female Socket", Height=8.5mm, Housing Material=Plastic, Lead Free="Lead Free", Length=10.7mm, Manufacturer Part Number=PPPC041LFBN-RC, Mount="Through Hole", Number of Positions=4, Number of Rows=1, Packaging=Bulk, Pitch=0.1inch, Pricing 1="1=0,47000, 10=0,40700, 100=0,33530, 500=0,29160, 1000=0,24057, 5000=0,21141, 10000=0,21060 (USD)", RoHS=Yes, RoHS Compliant=Yes, Stock 1=100451, Supplier 1=Digi-Key, Termination=Solder, Width=2.5mm
J31: library part PPTC061LFBN-RC, "Female, 6 C, Straight, .100\"CC; 3.20mm Tail, No Mt. 100u\" Tin; PBT, Phos Bronze, 105 C", Manufacturer=Sullins, Supplier Part Number 1=S7004-ND, Category=Connectors, ComponentLink1Description=https://media.digikey.com/pdf/Data%20Sheets/Sullins%20PDFs/Female_Headers.100_DS.pdf?src-supplier=Digi-Key, ComponentLink1URL=https://media.digikey.com/pdf/Data%20Sheets/Sullins%20PDFs/Female_Headers.100_DS.pdf?src-supplier=Digi-Key, ComponentLink2Description=http://www.sullinscorp.com/catalogs/78_Page80-81_HEADER_.100_2.54mm_FEMALE.pdf?src-supplier=Future+Electronics, ComponentLink2URL=http://www.sullinscorp.com/catalogs/78_Page80-81_HEADER_.100_2.54mm_FEMALE.pdf?src-supplier=Future+Electronics, Manufacturer Part Number=PPTC061LFBN-RC, Pricing 1="1=0,52000, 10=0,44900, 80=0,37050, 440=0,32220, 1000=0,26582, 5000=0,23360, 10000=0,23270 (USD)", RoHS=Yes, Stock 1=131305, Supplier 1=Digi-Key
J32: library part 110990030, "Grove - Universal 4 pin connector [Seeed Studio] 110990030 Grove - Universal 4 pin connector", Manufacturer="Seeed Studio", Supplier Part Number 1=1597-1082-ND, Category=Connectors, ComponentLink1Description=http://www.mouser.com/ds/2/744/Seeed_316010005-786598.pdf?src-supplier=Mouser, ComponentLink1URL=http://www.mouser.com/ds/2/744/Seeed_316010005-786598.pdf?src-supplier=Mouser, ComponentLink2Description=https://statics3.seeedstudio.com/images/opl/datasheet/3470130P1.pdf?src-supplier=Digi-Key, ComponentLink2URL=https://statics3.seeedstudio.com/images/opl/datasheet/3470130P1.pdf?src-supplier=Digi-Key, Manufacturer Part Number=110990030, Pricing 1="1=1,70000 (USD)", RoHS=No, Stock 1=3588, Supplier 1=Digi-Key
J51 J52 J53 J54: "2.54mm (0.1\") Pitch SIL Vertical PC Tail Pin Header, 6.1mm mating pin height, tin, 2 contacts", Case/Package=SIL, Color=Black, Contact Resistance=30mR, Current Rating=3A, Insulation Resistance=10GR, Manufacturer=Harwin, Max Operating Temperature=105°C, Min Operating Temperature=-40°C, Package Quantity=1000, Supplier Part Number 1=855-M20-9990246, Voltage Rating (AC)=750V, Category="Headers and Wire Housings", ComponentLink1Description=https://datasheet.ciiva.com/8046/315376-8046930.pdf?src-supplier=Element14, ComponentLink1URL=https://datasheet.ciiva.com/8046/315376-8046930.pdf?src-supplier=Element14, ComponentLink2Description=https://datasheet.ciiva.com/11745/0900766b81034e61-11745755.pdf?src-supplier=RSComponents, ComponentLink2URL=https://datasheet.ciiva.com/11745/0900766b81034e61-11745755.pdf?src-supplier=RSComponents, ComponentLink3Description=https://datasheet.ciiva.com/22660/1830818-22660571.pdf?src-supplier=Element14, ComponentLink3URL=https://datasheet.ciiva.com/22660/1830818-22660571.pdf?src-supplier=Element14, ComponentLink4Description=https://datasheet.ciiva.com/6833/m20-999-6833368.pdf?src-supplier=Digi-Key, ComponentLink4URL=https://datasheet.ciiva.com/6833/m20-999-6833368.pdf?src-supplier=Digi-Key, ComponentLink5Description=https://datasheet.ciiva.com/26852/getdatasheetpartid-384170-26852203.pdf?src-supplier=Verical, ComponentLink5URL=https://datasheet.ciiva.com/26852/getdatasheetpartid-384170-26852203.pdf?src-supplier=Verical, Connector Type="Male Pin", Contact Material=Brass,Bronze, Contact Mating Length=0.24inch, Contact Plating=Tin, Depth=2.54mm, Gender=Male, Housing Color=Black, Housing Material=Nylon, Length=5.08mm, Manufacturer Part Number=M20-9990246, Max Current Rating=3A, Mount="Through Hole", Number of Contacts=2, Number of Positions=2, Number of Rows=1, Orientation=Straight, Packaging=Bulk, Pitch=2.54mm, Pricing 1="1=0,17000, 10=0,08400, 50=0,08400, 100=0,07000, 500=0,06300, 1000=0,05400, 2000=0,04600, 10000=0,04500, 25000=0,03700, 50000=0,03500 (USD)", Radiation Hardening=No, REACH SVHC="No SVHC", RoHS=Yes, Stock 1=121083, Supplier 1=Mouser, Termination=Solder
Q41 Q42 Q43: "Transistor MOSFET N-Channel 30V 2.3A 3-Pin SOT-23", Manufacturer=Nexperia, Supplier Part Number 1=771-NXV55UNR, Manufacturer Part Number=NXV55UNR, Pricing 1="1=0,45000, 10=0,34400, 50=0,34400, 100=0,19500, 1000=0,09900, 10000=0,06800 (USD)", RoHS=No, Stock 1=55565, Supplier 1=Mouser
Q51 Q52: library part CMP-1048-00877-1, "Dual General Purpose Transistors, 6-Pin SOT-363, Pb-Free, Tape and Reel", Manufacturer="On Semiconductor", ComponentLink1Description="Manufacturer URL", ComponentLink1URL=http://www.onsemi.com/, ComponentLink2Description=Datasheet, ComponentLink2URL=http://www.onsemi.com/pub_link/Collateral/MBT3904DW1T1-D.PDF, ComponentLink3Description="Package Specification", ComponentLink3URL=http://www.onsemi.com/pub_link/Collateral/NTJD4001N-D.PDF, DatasheetVersion="Rev. 9", fT Min (MHz)=300, IC Continuous (A)=0.2, Mounting Technology="Surface Mount", PackageDescription="6-Pin Small Outline Transistor, Body 2 x 1.25 mm, Pitch 0.65 mm", PackageReference=SOT-363-6-419B-02_W, PackageVersion="Rev. W, 01/2006", Packing="Tape and Reel", PartNumber=MBT3904DW1T1G, Polarity="Dual NPN", RoHS=TRUE
Q53 Q54 Q55 Q56: "Single N-Channel 30 V 0.07 Ohms Surface Mount Power Mosfet - SOT-23", Case/Package=SOT-23, Continuous Drain Current (ID)=2.6A, Drain to Source Breakdown Voltage=30V, Drain to Source Resistance=70mR, Gate to Source Voltage (Vgs)=20V, Input Capacitance=225pF, Manufacturer=Vishay, Max Operating Temperature=150°C, Max Power Dissipation=750mW, Min Operating Temperature=-55°C, Package Quantity=1, Supplier Part Number 1=781-SI2304BDS-T1-E3, Threshold Voltage=1.5V, Category=MOSFETs, ComponentLink1Description=https://datasheet.ciiva.com/16225/si2304bds-16225072.pdf?src-supplier=Future+Electronics, ComponentLink1URL=https://datasheet.ciiva.com/16225/si2304bds-16225072.pdf?src-supplier=Future+Electronics, ComponentLink2Description=https://datasheet.ciiva.com/22707/1674170-22707810.pdf?src-supplier=Element14, ComponentLink2URL=https://datasheet.ciiva.com/22707/1674170-22707810.pdf?src-supplier=Element14, ComponentLink3Description=https://datasheet.ciiva.com/4439/si2304bds-107231-4439578.pdf?src-supplier=Mouser, ComponentLink3URL=https://datasheet.ciiva.com/4439/si2304bds-107231-4439578.pdf?src-supplier=Mouser, ComponentLink4Description=https://datasheet.ciiva.com/11161/si2304bds-11161450.pdf?src-supplier=Avnet, ComponentLink4URL=https://datasheet.ciiva.com/11161/si2304bds-11161450.pdf?src-supplier=Avnet, ComponentLink5Description=https://datasheet.ciiva.com/6367/si2304bds-6367035.pdf?src-supplier=Digi-Key, ComponentLink5URL=https://datasheet.ciiva.com/6367/si2304bds-6367035.pdf?src-supplier=Digi-Key, ComponentLink6Description=https://datasheet.ciiva.com/46386/1912647-46386540.pdf?src-supplier=Element14, ComponentLink6URL=https://datasheet.ciiva.com/46386/1912647-46386540.pdf?src-supplier=Element14, ComponentLink7Description=https://datasheet.ciiva.com/6367/si2304bds-6367038.pdf?src-supplier=Digi-Key, ComponentLink7URL=https://datasheet.ciiva.com/6367/si2304bds-6367038.pdf?src-supplier=Digi-Key, Drain to Source Voltage (Vdss)=30V, Element Configuration=Single, Fall Time=12.5ns, Height=1.02mm, Lead Free="Lead Free", Length=3.04mm, Manufacturer Part Number=SI2304BDST1E3, Mount="Surface Mount", Nominal Vgs=1.5V, Number of Channels=1, Number of Elements=1, Number of Pins=3, On-State Resistance=70mR, Packaging="Tape and Reel", Power Dissipation=750mW, Pricing 1="1=0,67000, 10=0,57800, 50=0,57800, 100=0,43200, 500=0,33900, 1000=0,26200, 3000=0,23800, 10000=0,23800 (USD)", Radiation Hardening=No, Rds On Max=70mR, REACH SVHC=Unknown, Rise Time=12.5ns, RoHS=Yes, Stock 1=13203, Supplier 1=Mouser, Turn-Off Delay Time=19ns, Turn-On Delay Time=7.5ns, Weight=0.050717oz, Width=1.4mm
R31 R32 R41 R42 R43 R51 R52 R53 R54 R55 R56 R57 R58 R59 R510 R511 R512 R513 R514 R515 R516 R517 R518 R519 R520 R521 R522 R523 R524 R525 R526 R527 R528: library part resistor
U21 U22: library part CMP-04892-000071-1, "1-CHANNEL, 8:1 GENERAL-PURPOSE A"
U23 U24: "Single Power Supply INVERTER Gate logic level shifter 5-SC70", High Level Output Current=8mA, Manufacturer="Texas Instruments", Max Operating Temperature=125°C, Min Operating Temperature=-40°C, Quiescent Current=10uA, Supplier Part Number 1=595-SN74LV1T04DCKRG4, Category="Logic Gates", ComponentLink1Description=http://www.ti.com/general/docs/suppproductinfo.tsp?distId=10&amp;gotoUrl=http%3A%2F%2Fwww.ti.com%2Flit%2Fgpn%2Fsn74lv1t04&src-supplier=Digi-Key, ComponentLink1URL=http://www.ti.com/general/docs/suppproductinfo.tsp?distId=10&amp;gotoUrl=http%3A%2F%2Fwww.ti.com%2Flit%2Fgpn%2Fsn74lv1t04&src-supplier=Digi-Key, Logic Function=Inverter, Low Level Output Current=8mA, Manufacturer Part Number=SN74LV1T04DCKRG4, Mount="Surface Mount", Number of Circuits=1, Number of Inputs=1, Packaging="Cut Tape", Pricing 1="1=0,56000, 10=0,47800, 50=0,47800, 100=0,33100, 1000=0,21700, 10000=0,19700 (USD)", Propagation Delay=7ns, RoHS=Yes, RoHS Compliant=Yes, Stock 1=13588, Supplier 1=Mouser
U31: "10-Bit, 189kSPS, 1-Ch SAR ADC with I2C and Alert Pin 6-SOT-23-THIN -40 to 105", Case/Package=TSSOP, Manufacturer="TI National Semiconductor", Max Operating Temperature=105°C, Max Power Dissipation=60mW, Max Supply Voltage=5.5V, Min Operating Temperature=-40°C, Min Supply Voltage=2.7V, Operating Supply Voltage=5V, Package Quantity=3000, Supplier Part Number 1=926-A101C021CIMKXNPB, Category="Analog to Digital Converters (ADCs)", ComponentLink1Description=https://datasheet.ciiva.com/13061/snas446c-181689-13061009.pdf?src-supplier=Mouser, ComponentLink1URL=https://datasheet.ciiva.com/13061/snas446c-181689-13061009.pdf?src-supplier=Mouser, ComponentLink2Description=https://datasheet.ciiva.com/14259/adc101c027-14259479.pdf?src-supplier=Avnet, ComponentLink2URL=https://datasheet.ciiva.com/14259/adc101c027-14259479.pdf?src-supplier=Avnet, ComponentLink3Description=https://datasheet.ciiva.com/6662/adc101c021-6662764.pdf?src-supplier=Digi-Key, ComponentLink3URL=https://datasheet.ciiva.com/6662/adc101c021-6662764.pdf?src-supplier=Digi-Key, Contact Plating=Tin,Matte, Conversion Rate=188.9KS/s, Differential Nonlinearity=0.7LSB, Full Scale Error=1LSB, Input Type=SINGLE-ENDED, Integral Nonlinearity (INL)=0.7LSB, Interface=I2C, Lead Free="Lead Free", Manufacturer Part Number=ADC101C021CIMKX/NOPB, Mount="Surface Mount", Number of A/D Converters=1, Number of Analog Inputs=1, Number of Bits=10, Number of Channels=1, Number of Converters=1, Number of Inputs=1, Number of Pins=6, Packaging="Tape and Reel", Polarity=Unipolar, Pricing 1="1=1,72000, 10=1,55000, 50=1,47000, 100=1,21000, 1000=0,78700, 10000=0,78700 (USD)", Radiation Hardening=No, Resolution=10b, RoHS=Yes, RoHS Compliant=Yes, Sampling Rate=188900S/s, Series=-, Signal to Noise Ratio (SNR)=61.8dB, Stock 1=2915, Supplier 1=Mouser, Supply Type=Analog,Digital,Single

## Free pads (board coordinates)
  round 5 hole 3: ""(4,3.5) ""(20.5,39.5) ""(45,46.5) ""(45.065,23.644)

## Via types
v1: diameter 0.85, hole 0.5, Top Layer 1 to Bottom Layer 1, 39 vias
v2: diameter 0.85/0.85/0.85/0.85 (per signal layer), hole 0.5, Top Layer 1 to Bottom Layer 1, 2 vias

## Nets (pads, with @x,y where several pads share a name; then routed paths per layer and width w, separated by ;. In a path a pad name is that pad's centre, name@x,y a point inside that pad or via, vN(x,y) a via of type N, cw(c..) or ccw(c..) an arc to the next point about the centre after c; other vN are vias at no path point)
+3V3: C32.2 C33.2 C34.2 C54.2 C510.2 J12.5 J12.7 J12.9 J12.17 J12.19 J13.3 J32.2 J33.1 J52.1 J54.1 Q54.3 Q56.3 R53.2 R510.2 R517.2 R524.2 U31.1 | length 38.9
  Top Layer 1 w0.254: R53.2@8.587,31.062 R53.2 11.5,30.975 ; v1(10.5,33) 10.5,31.975 11.5,30.975 ; R517.2@12.413,31.062 R517.2 11.5,30.975 ; v1(24,60) 24,59.851 C32.2 C33.2 29.076,59.775 C34.2 32.35,59.775 32.8,59.325 U31.1 ; Q54.3 26.5,50.025 Q54.3@26.5,50 ; C54.2 27,48.55 26.5,49.05 Q54.3@26.5,50 ; R510.2@29,31 R510.2 29.025,31 30,31 ; v1(31,33) 31,32 30,31 ; R524.2 30,31 ; C510.2 35,48 35.5,48.5 Q56.3 v1(34,50) 28.907,50 Q54.3@26.5,50
  other v1: 18,28.5
+3V3_NFC: C511.2 J31.1 J54.2 Q56.2 | length 7.2
  Top Layer 1 w0.254: Q56.2 38.55,50.95 40,49.5 40,48.163 ; v1(39,49) 39.837,48.163 40,48.163 ; C511.2 40,48.163
+3V3_US: C55.2 J52.2 Q54.2 U24.5 | length 5.1
  Top Layer 1 w0.254: v1(23,49) 23.075,49.075 Q54.2 24.5,49.068 C55.2 ; U24.5 31.5,24.19 v1(31.5,25.5)
+5V: C51.2 C57.2 J01.1 J12.2 J12.4 J12.6 J51.1 J53.1 Q53.3 Q55.3 R41.2 R42.2 R43.2 | length 36.2
  Top Layer 1 w0.254: J51.1 9.5,54 v1(13.5,50) ; C51.2 6.5,48 6,48.5 Q53.3 v1(13.5,50) ; C57.2 14.5,48 15,48.5 Q55.3 v1(13.5,50) ; R42.2@23.35,72.5 R42.2@23.475,72.625 ; R42.2 23.5,72.475 23.5,68.525 R41.2 23.5,68.475 23.5,64.525 R43.2 23.47,64.495 23.47,63.369 23.839,63 v1(24,63)
+5V_US: C21.2 C22.2 C52.2 J21.1 J22.1 J23.1 J24.1 J25.1 J51.2 Q53.2 U21.16 U22.16 U23.5 | length 13.8
  Top Layer 1 w0.254: v1(2.681,49.044) 2.684,49.047 4.029,49.047 Q53.2 4.032,46.858 C52.2 ; v2(17,18.661) 18.339,20 C22.2 19.674,21.174 20.125,21.625 U22.16 ; v2(17.5,8.5) C21.2 19.674,9.674 20,10 20,10.648 20.077,10.725 U21.16
+12V: J12.14 J12.16 J12.18 R31.2 R52.1 R59.1 R516.1 R523.1 | length 8
  Top Layer 1 w0.254: R52.1 R516.1 ; v1(28.5,53.5) R31.2 ; R59.1 32.475,47.05 R523.1
  other v1: 10.5,47 31,47
BALISE_I2C_SCL: J33.4 J34.10 | length 15.1
  Top Layer 1 w0.254: J33.4 27.5,1.7 29.122,3.323 34.322,3.323 38,7 38.923,7.923 39.463,7.923 J34.10
BALISE_I2C_SDA: J33.3 J34.7 | length 21.1
  Top Layer 1 w0.254: J33.3 25.246,1.786 25.992,1.786 28.706,4.5 33.851,4.5 34,4.649 38.693,9.342 40.882,9.342 J34.7
BAT_ALERT: J14.12 Q43.1 U31.4 | length 15.9
  Top Layer 1 w0.254: Q43.1 33.511,63.6 34.063,63.048 34.063,57.325 34.615,56.773 35.002,56.773 U31.4 35.425,56.575 35.623,56.377 35.623,55.757 J14.12
BAT_I2C_SCL: J14.8 U31.5 | length 4.9
  Top Layer 1 w0.254: U31.5 38.819,57.525 39.614,56.73 J14.8
BAT_I2C_SDA: J14.7 U31.6 | length 7.8
  Top Layer 1 w0.254: U31.6 36.385,58.475 36.742,58.118 40.882,58.118 J14.7
GND: C11.1 C12.1 C13.1 C21.1 C22.1 C31.1 C32.1 C33.1 C34.1 C53.1 C56.1 C59.1 C512.1 J01.2 J01.3 J11.5 J11.7 J11.10 J11.12 J11.13 J11.15 J11.18 J11.20 J12.1 J12.3 J12.8 J12.10 J12.11 J12.12 J12.13 J12.15 J12.20 J13.2 J13.6 J14.3 J14.4 J21.4 J22.4 J23.4 J24.4 J25.4 J26.3 J26.4 J31.2 J31.6 J32.1 J33.2 J34.3 J34.4 pad. Q41.2 Q42.2 Q43.2 R32.1 R56.1 R57.1 R513.1 R514.1 R520.1 R521.1 R527.1 R528.1 U21.6 U21.8 U22.6 U22.8 U23.3 U24.3 U31.2 | length 15.8
  Top Layer 1 w0.254: C12.1 C11.1 ; C31.1 26.348,58.351 C32.1 ; v1(25,53.5) R32.1 ; C32.1@26.5,58.373 28.826,58.373 C33.1 30.924,58.199 C34.1 31.111,58.164 31.732,58.164 32.174,57.723 32.602,57.723 U31.2 ; J11.10 J11.12 ; J11.18 J11.20
  other v1: 23,8.5 28.5,14 28.532,56.532 34.5,65.5 34,69.5 34,73.5
GSM_PWR_5VIN: C11.2 C12.2 C13.2 C58.2 J13.1 J53.2 Q55.2 | length 20.2
  Top Layer 1 w0.254: Q55.2 Q55.2@17.05,50.95 ; J53.2 17.706,60.254 17.706,59.294 18.5,58.5 18.5,57.514 C11.2 C12.2 C12.2@18.486,54.603 ; C13.2 18.385,53 18.012,52.627 18.012,52.615 17.385,51.988 17.345,51.988 16.968,51.611 16.968,51.103 17.05,51.02 Q55.2@17.05,50.95 ; C13.2@18.486,53.076 C12.2@18.486,54.603 ; C58.2 19.5,50.5 19.05,50.95 Q55.2@17.05,50.95 ; J13.1 20.763,54.603 C12.2@18.486,54.603
  Top Layer w0.254: J13.1@20.5,54.34 J13.1
GSM_RST: J13.7 J14.9 | length 28.8
  Bottom Layer 1 w0.254: J13.7 26.42,70.08 38.382,58.118 39.971,58.118 41.105,56.984 41.105,55.355 J14.9
GSM_UART_RXD: J13.5 J14.10 | length 23.2
  Bottom Layer 1 w0.254: J13.5 28.92,65 J14.10
GSM_UART_TXD: J13.4 J14.11 | length 25.7
  Bottom Layer 1 w0.254: J13.4 21.562,62.46 22.022,62 30.291,62 39.253,53.038 40.882,53.038 J14.11
HOLO_LED_DEBUG: J11.16 Q42.1 | length 15.7
  Top Layer 1 w0.254: Q42.1 34.05,71.55 35.5,73 45.08,73 J11.16
HOLO_LED_PWR: J11.14 Q41.1 | length 16.3
  Top Layer 1 w0.254: Q41.1 33.471,67.55 34.894,68.973 34.894,70.666 36.318,72.09 44.72,72.09 J11.14
HOLO_UART_RX: J11.1 J14.6 | length 12.7
  Bottom Layer 1 w0.254: J11.1 37.775,69.855 37.775,69.275 36.5,68 36.5,62.5 J14.6
HOLO_UART_TX: J11.3 J14.5 | length 14
  Bottom Layer 1 w0.254: J11.3 39.23,69.96 39.23,69.57 38,68.34 38,61.911 39.253,60.658 40.882,60.658 J14.5
IMU_I2C_SCL: J32.4 J34.8 | length 28.1
  Top Layer 1 w0.254: J32.4 16.5,4 26,4 28,6 33.5,6 38,10.5 39.5,10.5 J34.8
IMU_I2C_SDA: J32.3 J34.6 | length 31.3
  Top Layer 1 w0.254: J32.3 13,2.7 15.8,5.5 25.5,5.5 27.5,7.5 33,7.5 38.524,13.024 39.484,13.024 J34.6
NetC31_2: C31.2 R31.1 R32.2 U31.3 | length 10.2
  Top Layer 1 w0.254: C31.2 25.201,56.699 26.35,55.55 R32.2 30.65,55.55 32.651,55.55 32.8,55.699 U31.3
NetC51_1: C51.1 C52.1 Q51.6 R51.1 R52.2 | length 10.8
  Top Layer 1 w0.254: R51.1 1.699,45.174 C52.1@4.029,45.174 ; C52.1 4.014,45.16 C52.1@4.029,45.174 ; Q51.6@9.777,42.54 9.85,42.467 Q51.6 9.923,42.523 9.923,43.081 9.937,43.095 9.937,43.376 9.087,44.226 9.087,44.888 6.786,44.888 C51.1 C52.1@4.029,45.174
NetC53_2: C53.2 Q51.2 R55.2 R56.2 | length 10.2
  Top Layer 1 w0.254: C53.2 5.699,37.525 6.5,37.525 ; R56.2 7.025,38.993 7.027,38.991 7.027,38.052 6.5,37.525 ; Q51.2 10.427,40.477 10.427,39.927 10,39.5 9,39.5 8.5,39 R55.2 6.5,37.525
NetC54_1: C54.1 C55.1 Q52.6 R58.1 R59.2 | length 10.6
  Top Layer 1 w0.254: R58.1 22.175,45.2 24.15,45.2 24.256,45.306 24.419,45.306 C55.1 C54.1 29.276,45.224 R59.2 29.5,44 30.35,43.15 Q52.6
NetC56_2: C56.2 Q52.2 R512.2 R513.2 | length 10.5
  Top Layer 1 w0.254: C56.2 26,37.396 C56.2@26.186,37.583 ; C56.2@26.206,37.532 27,37.532 ; 27.025,37.557 27,37.532 ; R513.2 27.025,38.007 27.5,37.532 ; Q52.2 30.987,40.537 30.987,39.656 30.838,39.507 29.487,39.507 28.987,39.007 28.987,37.538 R512.2 28.993,37.532 27.5,37.532 ; 27,37.532 27.5,37.532
NetC57_1: C57.1 C58.1 Q51.3 R515.1 R516.2 | length 19
  Top Layer 1 w0.254: v1(10.587,38.062) 10.587,38.076 11.15,38.639 Q51.3 ; v1(12.087,43.562) 12.087,44.888 R516.2 12.498,45.473 14.201,45.473 C57.1 14.5,45.248 14.988,45.736 16.089,45.736 16.85,44.975 R515.1 ; R515.1@17.087,44.975 17.585,45.473 19.201,45.473 C58.1
  Bottom Layer 1 w0.254: v1(10.587,38.062) 12.087,39.562 v1(12.087,43.562)
NetC59_2: C59.2 Q51.5 R519.2 R520.2 | length 9.9
  Top Layer 1 w0.254: Q51.5 10.573,42.377 10.573,42.115 12.688,40 R520.2 13.975,38 13.5,37.525 ; R519.2 13.5,37.525 ; C59.2 14.801,37.525 13.5,37.525
NetC510_1: C510.1 C511.1 Q52.3 R522.1 R523.2 | length 18.1
  Top Layer 1 w0.254: v1(31,38) 31.65,38.65 Q52.3 ; v1(32.5,43.5) R523.2 34.801,44.975 C510.1 ; C510.1@35,45.1 35.125,44.975 R522.1 39.801,44.975 C511.1
  Bottom Layer 1 w0.254: v1(31,38) 32.5,39.5 v1(32.5,43.5)
NetC512_2: C512.2 Q52.5 R526.2 R527.2 | length 10.4
  Top Layer 1 w0.254: Q52.5 31.073,42.377 31.073,42.115 33.188,40 R527.2 34.475,38.025 35,37.5 ; R526.2 33.025,37.5 35,37.5 ; C512.2 35.826,37.5 35,37.5
NetD1_1: D1.1 Q41.3 | length 1.7
  Top Layer 1 w0.254: D1.1 30.492,68.5 Q41.3